# Allegro board CY8CPROTO-063-BLE Layout.brd
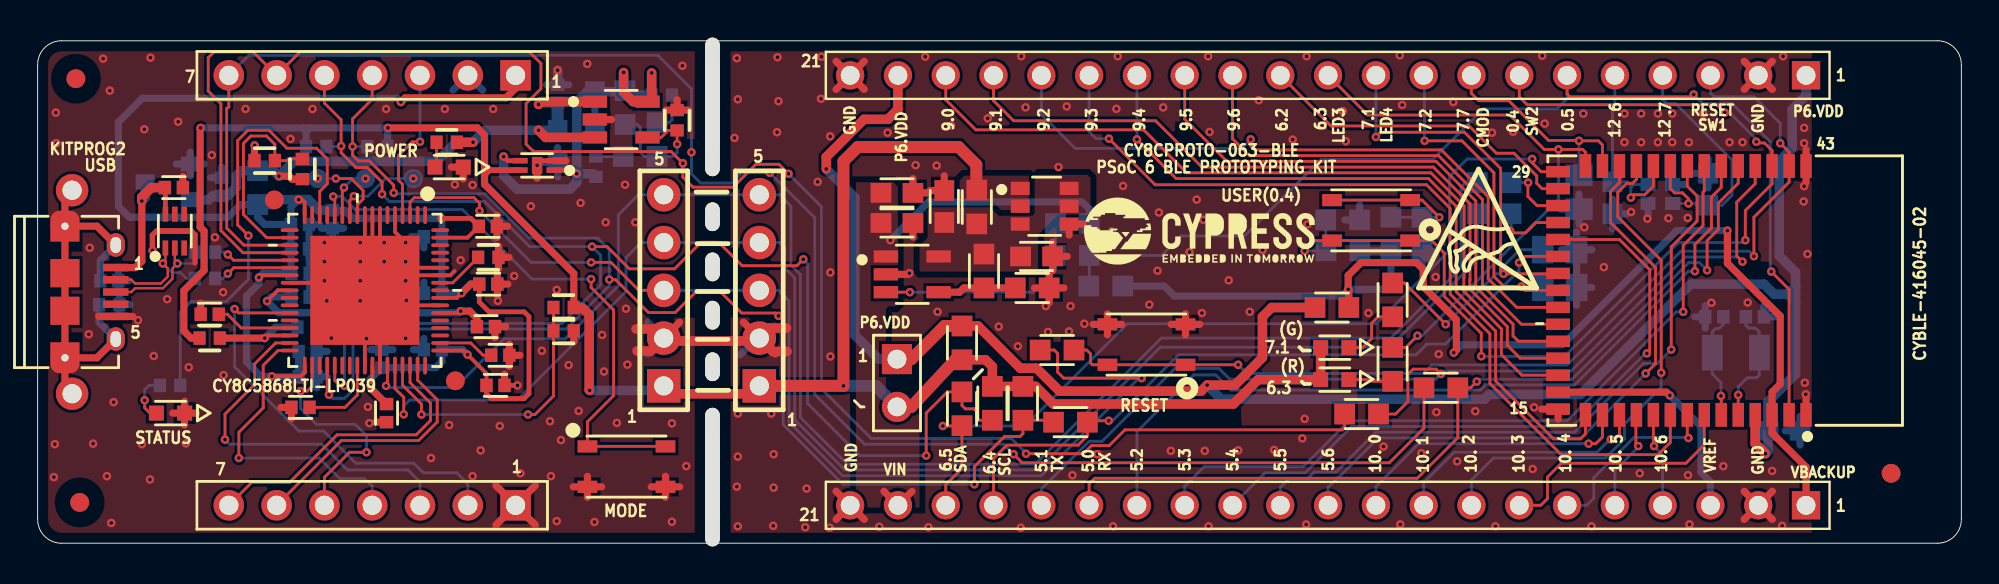
[diagram p0: board, top side]
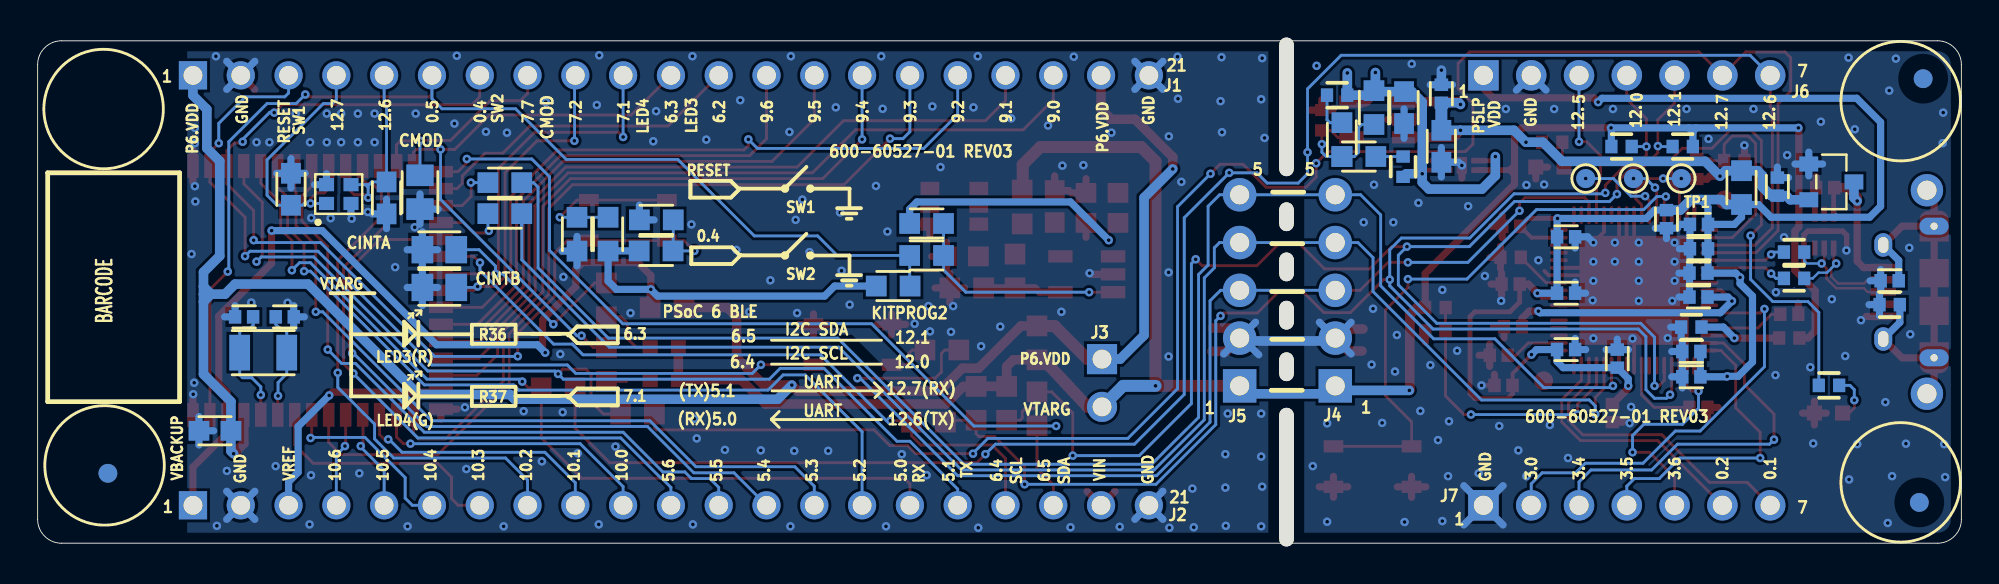
[diagram p1: board, bottom side, seen from below]

Outline 102.23 x 26.72 mm; copper layers: TOP, BOTTOM. Coordinates in mm from the lower left corner of the outline.
Outline path: 0,25.45 0,1.27 arc(0.37,0.37) 1.27,0 100.97,0 arc(101.86,0.37) 102.23,1.27 102.23,25.45 arc(101.86,26.34) 100.97,26.72 1.27,26.72 arc(0.37,26.34) 0,25.45

## Design rules (mm)
net group DIFFPAIR0: nets KP_DM KP_DP
net group POWER_PH: nets P5LP_VCCD P5LP_VDD
net group USB_V_SENSE: nets USB_V_SENSE VBUS
net group PWR_PH: nets GND_EARTH1
net group VTARG: nets I2C_SCL I2C_SDA P5LP_SIO_VREF VTARG_MEAS

## Placement (name value [footprint] x y rotation side)
C1  10nF  [CAPC1005_0402N]  3.81 13.95 0 bottom
C2  0.1uF  [CAPC1005_0402N]  7.24 18.91 0 top
C3  1.0 uF  [CAPC1005_0402N]  14.35 10.2 0 bottom
C4  0.1uF  [CAPC1005_0402N]  21.01 13.29 180 bottom
C5  1.0 uF  [CAPC1005_0402N]  13.97 14.36 0 bottom
C6  0.1uF  [CAPC1005_0402N]  23.93 16.85 0 top
C7  1.0 uF  [CAPC1005_0402N]  23.95 13.78 0 top
C8  0.1uF  [CAPC1005_0402N]  24.33 8.39 0 top
C9  1.0 uF  [CAPC1005_0402N]  21.01 16.29 180 bottom
C10  0.1uF  [CAPC1005_0402N]  13.94 15.66 0 bottom
C11  1.0 uF  [CAPC1005_0402N]  24.59 9.99 0 top
C12  1.0 uF  [CAPC1005_0402N]  9.14 12.18 180 top
C13  1.0 uF  [CAPC1005_0402N]  13.97 7.22 180 top
C14  1.0 uF  [CAPC1005_0402N]  23.83 11.52 0 top
C15  0.1uF  [CAPC1005_0402N]  13.97 13.09 0 bottom
C16  1.0 uF  [CAPC1005_0402N]  13.94 16.95 0 bottom
C17  0.1uF  [CAPC1005_0402N]  18.54 6.92 270 top
C18  1.0 uF  [CAPC1005_0402N]  21.01 10.3 180 bottom
C19  0.1uF  [CAPC1005_0402N]  18.29 9.81 90 bottom
C20  1.0 uF  [CAPC1005_0402N]  14.35 8.85 0 bottom
C21  0.1uF  [CAPC1005_0402N]  15.67 17.23 270 bottom
C22  4.7uF  [CAPC1608_0603M]  27.64 21.1 270 bottom
C23  0.1uF  [CAPC1005_0402N]  27.64 23.9 90 bottom
C24  4.7uF  [CAPC1608_0603M]  29.62 23.16 270 bottom
C25  4.7uF  [CAPC1608_0603M]  45.67 18.63 0 top
C26  0.1uF  [CAPC1608_0603M]  45.67 17.03 0 top
C27  4.7uF  [CAPC1608_0603M]  48.18 17.9 90 top
C28  0.1uF  [CAPC1608_0603M]  53.09 15.25 0 top
C29  10uF  [CAPC1608_0603M]  92.81 5.98 0 bottom
C30  0.47nF  [CAPC2012_0805N]  80.89 15.61 180 bottom
C31  0.47nF  [CAPC2012_0805N]  80.89 13.6 180 bottom
C32  2.2nF  [CAPC2012_0805N]  81.91 18.66 90 bottom
C34  10pF  [CAPC1608_0603M]  83.69 18.36 90 bottom
C35  10pF  [CAPC1608_0603M]  88.77 18.82 270 bottom
C36  18pF  [CAPC1005_0402N]  91.26 12.04 0 bottom
C37  33pF  [CAPC1005_0402N]  89.1 12.04 180 bottom
C38  0.1uF  [CAPC1005_0402N]  9.78 18.96 90 bottom
J1  CON 21x1  [CTST254P1X21_W260]  93.98 24.88 180 top
J2  CON 21x1  [CTST254P1X21_W260]  93.98 2.02 180 top
J3  HDR2  [3M_961102-6404-AR]  45.67 9.79 270 top
J4  CON 5x1  [HDR5X1]  33.27 8.37 0 top
J5  CON 5x1  [HDR5X1]  38.35 8.37 0 top
J6  CON 7x1  [SULLINS_PPTC071LFBN-RC]  25.4 24.88 180 top
J7  CON 7x1  [SULLINS_PPTC071LFBN-RC]  25.4 2.02 180 top
J8  10118194-0001LF  [FCI_10118194-0001LF]  4.15 14.66 270 top
JMP1  USB_Hold  [CON_RA_STIFF_850P]  1.83 7.95 90 top
LED1  AMBER LED  [LEDC1608_0603N]  21.87 20 0 top
LED2  AMBER LED  [LEDC1608_0603N]  7.06 6.92 0 top
LED3  RED LED  [LEDC1608_0603N]  68.94 8.7 0 top
LED4  GREEN LED  [LEDC1608_0603N]  68.94 10.4 0 top
NOREF  -  [unnamed]  35.86 4.15 0 top
NOREF#2  -  [#2]  101.86 0.37 0 top
NOREF#3  -  [#2]  101.35 46.25 0 top
NOREF#4  -  [unnamed#2]  35.86 9.38 0 top
NOREF#5  -  [unnamed#3]  2.24 2.17 0 top
NOREF#6  -  [#2]  76.68 -0.65 0 top
NOREF#7  -  [unnamed#2]  35.86 17.36 0 top
NOREF#8  -  [unnamed#2]  35.86 12.13 0 top
NOREF#9  -  [#2]  5.53 0 90 top
NOREF#10  -  [unnamed#3]  98.5 3.72 0 top
NOREF#11  -  [unnamed]  35.86 2.88 0 top
NOREF#12  -  [#2]  0 2.64 0 top
NOREF#13  -  [#2]  61.74 16.6 0 top
NOREF#14  -  [#2]  94.54 243.77 0 top
NOREF#15  -  [#2]  -10.67 -12.85 0 top
NOREF#16  -  [unnamed#3]  2.03 24.7 0 top
NOREF#17  -  [unnamed]  35.86 22.57 0 top
NOREF#18  -  [unnamed#2]  35.86 14.69 0 top
NOREF#19  -  [#2]  -310.39 -234.9 0 top
NOREF#20  -  [#2]  76.32 16.38 0 top
NOREF#21  -  [unnamed]  35.86 23.84 0 top
NOREF#22  -  [#2]  81.97 34.6 0 top
NOREF#23  -  [unnamed#3]  98.5 3.72 180 bottom
NOREF#24  -  [unnamed#3]  2.24 2.17 180 bottom
NOREF#25  -  [#2]  104.57 45.55 90 bottom
NOREF#26  -  [unnamed#3]  2.03 24.7 180 bottom
NOREF#27  -  [#2]  16.66 7.91 180 bottom
NOREF#28  -  [#2]  116.66 14.79 180 bottom
R1  100K  [RESC1005_0402M]  3.81 12.68 0 bottom
R2  2.2K  [RESC1005_0402M]  21.74 21.32 180 top
R3  0ohm  [RESC1608_0603M]  11.68 18.91 90 bottom
R4  15K  [RESC1005_0402M]  14.07 19.9 90 top
R5  30K  [RESC1005_0402M]  12.06 20.34 0 top
R6  180K  [RESC1608_0603M]  31.22 23.16 90 bottom
R7  57.6K  [RESC1005_0402M]  33.99 22.49 90 top
R8  383K  [RESC1005_0402M]  33.17 23.82 180 bottom
R9  0ohm  [RESC1608_0603M]  32.92 21.46 90 bottom
R12  100K  [RESC1005_0402M]  23.95 15.2 180 top
R13  49.9K  [RESC1005_0402M]  27.95 12.53 180 top
R14  49.9K  [RESC1005_0402M]  27.95 11.29 180 top
R15  15K  [RESC1005_0402M]  9.14 10.91 0 top
R16  30K  [RESC1005_0402M]  14.35 11.49 180 bottom
R17  2.2K  [RESC1005_0402M]  7.04 8.39 180 bottom
R18  22E  [RESC1005_0402M]  8.89 15.48 0 bottom
R19  22E  [RESC1005_0402M]  8.89 14.08 0 bottom
R20  4.7K  [RESC1005_0402M]  14.81 21.09 180 bottom
R21  4.7K  [RESC1005_0402M]  18.06 21.09 0 bottom
R22  180K  [RESC1608_0603M]  50.29 14.47 90 top
R23  57.6K  [RESC1608_0603M]  52.86 13.57 0 top
R27  0ohm  [RESC1608_0603M]  49.91 17.88 270 top
R28  0ohm  [RESC1608_0603M]  49.12 10.65 270 top
R29  0ohm  [RESC1608_0603M]  68.78 12.53 180 top
R30  10K  [RESC1608_0603M]  69.35 17.19 180 bottom
R31  0ohm  [RESC1608_0603M]  73.57 16.43 270 bottom
R32  0ohm  [RESC1608_0603M]  71.92 16.43 90 bottom
R33  10K  [RESC1608_0603M]  69.37 15.54 0 bottom
R36  470ohm  [RESC1608_0603M]  72.01 9.51 270 top
R37  330ohm  [RESC1608_0603M]  72.01 12.94 90 top
R38  4.7K  [RESC1608_0603M]  50.74 7.44 90 top
R39  4.7K  [RESC1608_0603M]  52.36 7.44 90 top
R40  120K  [RESC1005_0402M]  29.67 20.02 270 bottom
R41  0ohm  [RESC1608_0603M]  32.02 20.56 180 bottom
R44  0ohm  [RESC1608_0603M]  54.99 15.3 180 bottom
R45  10K  [RESC1608_0603M]  56.77 13.68 0 bottom
R46  0ohm  [RESC1608_0603M]  54.99 17 180 bottom
R47  0ohm  [RESC1608_0603M]  54.18 10.27 0 top
R48  0ohm  [RESC1608_0603M]  77.41 17.52 0 bottom
R49  0ohm  [RESC1608_0603M]  77.41 19.17 0 bottom
R50  0ohm  [RESC1608_0603M]  54.89 6.44 0 top
R51  0ohm  [RESC1608_0603M]  49.12 7.15 270 top
R52  0ohm  [RESC1608_0603M]  74.57 8.27 0 top
R53  0ohm  [RESC1608_0603M]  70.36 6.87 0 top
SW1  SKRPACE010  [SW_SKRPACE010]  58.93 10.56 180 top
SW2  SKRPACE010  [SW_SKRPACE010]  70.87 17.17 180 top
SW3  SKRPACE010  [SW_SKRPACE010]  31.29 4.07 0 top
TP1  TP_SMD  [TP102C]  14.88 19.39 180 bottom
TP2  TP_SMD  [TP102C]  19.96 19.39 180 bottom
TP3  TP_SMD  [TP102C]  17.42 19.39 180 bottom
U1  CY8C5868LTI-LP039  [QFN40P800X800X100-69M]  17.39 13.45 270 top
U2  AP7365-WG-7  [SOT95P285X140-5M]  31.01 22.53 0 top
U3  SiP32408  [TDFN50P160X120X60-5M]  26.54 20.09 180 top
U4  PUSBM12VX4-TL,115  [SON50P160X160X50-7M]  7.29 16.6 90 top
U5  CYBLE-416045-02  [BLE-QFN43-416045]  80.41 20.44 270 top
U6  AP7365-WG-7  [SOT95P285X140-5M]  46.48 14.3 0 top
U7  SIP32510DT-T1-GE3  [SOT26-1_2_3_4_5_6]  53.52 17.92 0 top
U8  AP2331TDW-7  [SC-59_1_2_3]  6.91 19.21 180 bottom
Y1  24MHz  [XTALS4_2MX1M6]  86.23 18.56 90 bottom
Y2  32.768KHz  [XTAL320X150X90N_ECS]  90.25 10.13 180 bottom

## Library data of the parts
C1 C2 C26 C28 C38 = CAPACITOR NON-POL
C3 C5 C7 C9 C11-C14 C16 C18 C20 = CAPACITOR NON-POL: signal model: DEFAULT_CAPACITOR_1e+06pF_2_1
C4 C6 C8 C10 C15 C17 C19 C21 = CAPACITOR NON-POL: signal model: DEFAULT_CAPACITOR_100000pF_2_1
C22-C25 C27 C29 C34 C35 = CAP-NP
C30-C32 = CAP
C36 C37 = CAP NP
J1 J2 = CONN TRBLK 23_2: User Part Number: Part No
J3 = HEADER 2_0
J4 = CONN PCB 5_0
J5 = CONN PCB 5
J6 J7 = CONN PCB 7
J8 = USB MICRO R/A DIP_1
JMP1 = USB_JUMP_0
LED1 LED2 LED4 = LED_2
LED3 = LED_1
R1-R3 R6-R9 R17-R19 R22 R23 R27-R30 R33 R36 R40 R41 R44-R53 = RESISTOR
R4 R15 = RESISTOR: signal model: DEFAULT_RESISTOR_15000OHM_2_1
R5 R16 = RESISTOR: signal model: DEFAULT_RESISTOR_30000OHM_2_1
R12 = RESISTOR: signal model: DEFAULT_RESISTOR_100000OHM_2_1
R13 R14 = RESISTOR: signal model: DEFAULT_RESISTOR_49900OHM_2_1
R20 R21 R38 R39 = RESISTOR: signal model: DEFAULT_RESISTOR_4700OHM_2_1
R31 R32 = 330 ohm 5% 0805_0
R37 = RES
SW1-SW3 = SW PUSH NO 4-PIN
TP1-TP3 = TEST_POINT
U1 = CY8C38***-QFN68_0
U2 = AP7365-WG-7_5
U3 = SiP32408_1
U4 = PUSBM12VX4-TL,115_0
U5 = CY8CTMA300-48LQXI_29
U6 = AP7365-WG-7_6
U7 = SiP32408_3
U8 = AP2331TDW-7_1: User Part Number: Part No
Y1 = CRYSTAL_4pads: User Part Number: Part No
Y2 = CRYSTAL

## Footprints (pads in the part's own frame, mm; a bottom-side part is the same pattern mirrored in y, then rotated)
3M_961102-6404-AR
  rect 1.6x1.6 hole 1: 1(0,0)
  round 1.6 hole 1: 2(2.54,0)
BLE-QFN43-416045
  rect 1.27x0.61 smd: 1(13.619,13.571) 2(13.619,12.669) 3(13.619,11.768) 4(13.619,10.866) 5(13.619,9.964) 6(13.619,9.062) 7(13.619,8.161) 8(13.619,7.259) 9(13.619,6.357) 10(13.619,5.456) 11(13.619,4.554) 12(13.619,3.652) 13(13.619,2.751) 14(13.619,1.849) 30(0.388,1.849) 31(0.388,2.751) 32(0.388,3.652) 33(0.388,4.554) 34(0.388,5.456) 35(0.388,6.357) 36(0.388,7.259) 37(0.388,8.161) 38(0.388,9.062) 39(0.388,9.964) 40(0.388,10.866) 41(0.388,11.768) 42(0.388,12.669) 43(0.388,13.571)
  rect 0.61x1.27 smd: 15(13.312,0.391) 16(12.41,0.391) 17(11.509,0.391) 18(10.607,0.391) 19(9.705,0.391) 20(8.804,0.391) 21(7.902,0.391) 22(7,0.391) 23(6.099,0.391) 24(5.197,0.391) 25(4.295,0.391) 26(3.393,0.391) 27(2.492,0.391) 28(1.59,0.391) 29(0.688,0.391)
CAPC1005_0402N
  rect 0.66x0.72 smd: 1(-0.48,0) 2(0.48,0)
CAPC1608_0603M
  rect 1.1x1.05 smd: 1(-0.85,0) 2(0.85,0)
CAPC2012_0805N
  rect 1.15x1.45 smd: 1(-0.9,0) 2(0.9,0)
CON_RA_STIFF_850P
  round 1.72 hole 1.02: 1(0,0) 2(10.82,0)
CTST254P1X21_W260
  rect 1.5x1.5 hole 1: 1(0,0)
  round 1.5 hole 1: 2(2.54,0) 3(5.08,0) 4(7.62,0) 5(10.16,0) 6(12.7,0) 7(15.24,0) 8(17.78,0) 9(20.32,0) 10(22.86,0) 11(25.4,0) 12(27.94,0) 13(30.48,0) 14(33.02,0) 15(35.56,0) 16(38.1,0) 17(40.64,0) 18(43.18,0) 19(45.72,0) 20(48.26,0) 21(50.8,0)
FCI_10118194-0001LF
  rect 0.4x1.35 smd: 1(0,0) 2(0.65,0) 3(1.3,0) 4(1.95,0) 5(2.6,0)
  oval 1.25x0.95 hole 0.85x0.55: SH1(-1.2,0) SH2(3.8,0)
  custom 1.645x1.55 hole 1.15x0.5: SH3(-2.2,-2.7) SH6(4.8,-2.7)
  rect 1.5x1.55 smd: SH4(0.3,-2.7) SH5(2.3,-2.7)
HDR5X1
  rect 1.778x1.778 hole 1.016: 1(0,0)
  round 1.778 hole 1.016: 2(0,2.54) 3(0,5.08) 4(0,7.62) 5(0,10.16)
LEDC1608_0603N
  rect 0.8x0.8 smd: A(-0.75,0) K(0.75,0)
QFN40P800X800X100-69M
  round 1 smd: (-4.809,-4.809) (4.809,4.809)
  oval 0.95x0.2 smd: 1(-4,3.2) 2(-4,2.8) 3(-4,2.4) 4(-4,2) 5(-4,1.6) 6(-4,1.2) 7(-4,0.8) 8(-4,0.4) 9(-4,0) 10(-4,-0.4) 11(-4,-0.8) 12(-4,-1.2) 13(-4,-1.6) 14(-4,-2) 15(-4,-2.4) 16(-4,-2.8) 17(-4,-3.2) 35(4,-3.2) 36(4,-2.8) 37(4,-2.4) 38(4,-2) 39(4,-1.6) 40(4,-1.2) 41(4,-0.8) 42(4,-0.4) 43(4,0) 44(4,0.4) 45(4,0.8) 46(4,1.2) 47(4,1.6) 48(4,2) 49(4,2.4) 50(4,2.8) 51(4,3.2)
  oval 0.2x0.95 smd: 18(-3.2,-4) 19(-2.8,-4) 20(-2.4,-4) 21(-2,-4) 22(-1.6,-4) 23(-1.2,-4) 24(-0.8,-4) 25(-0.4,-4) 26(0,-4) 27(0.4,-4) 28(0.8,-4) 29(1.2,-4) 30(1.6,-4) 31(2,-4) 32(2.4,-4) 33(2.8,-4) 34(3.2,-4) 52(3.2,4) 53(2.8,4) 54(2.4,4) 55(2,4) 56(1.6,4) 57(1.2,4) 58(0.8,4) 59(0.4,4) 60(0,4) 61(-0.4,4) 62(-0.8,4) 63(-1.2,4) 64(-1.6,4) 65(-2,4) 66(-2.4,4) 67(-2.8,4) 68(-3.2,4)
  rect 5.8x5.8 smd: H(0,0)
RESC1005_0402M
  rect 0.65x0.72 smd: 1(-0.54,0) 2(0.54,0)
RESC1608_0603M
  rect 1.1x1.1 smd: 1(-0.9,0) 2(0.9,0)
SC-59_1_2_3
  rect 1x0.8 smd: 1(-1.2,0.95) 2(-1.2,-0.95) 3(1.2,0)
SON50P160X160X50-7M
  rect 0.8x0.3 smd: 1(-0.9,0.5) 2(-0.9,0) 3(-0.9,-0.5) 4(0.9,-0.5) 5(0.9,0) 6(0.9,0.5)
  rect 0.3x1.6 smd: 7(0,0)
SOT26-1_2_3_4_5_6
  rect 1x0.7 smd: 1(-1.3,0.95) 2(-1.3,0) 3(-1.3,-0.95) 4(1.3,-0.95) 5(1.3,0) 6(1.3,0.95)
SOT95P285X140-5M
  rect 1.3x0.65 smd: 1(-1.4,0.95) 2(-1.4,0) 3(-1.4,-0.95) 4(1.4,-0.95) 5(1.4,0.95)
SULLINS_PPTC071LFBN-RC
  rect 1.62x1.62 hole 1.02: 1(0,0)
  round 1.62 hole 1.02: 2(2.54,0) 3(5.08,0) 4(7.62,0) 5(10.16,0) 6(12.7,0) 7(15.24,0)
SW_SKRPACE010
  rect 1.05x0.65 smd: 1(-2.075,1.075) 2(2.075,1.075) 3(-2.075,-1.075) 4(2.075,-1.075)
TDFN50P160X120X60-5M
  rect 0.8x0.3 smd: 1(-0.9,0.25) 2(-0.9,-0.25) 3(0.9,-0.25) 4(0.9,0.25)
  rect 0.55x0.9 smd: H(0,0)
TP102C
  round 1.016 smd: 1(0,0)
unnamed
  oval 0.762x6.096 hole 0.762x6.096 unplated: (0,0)
unnamed#2
  oval 0.762x1.524 hole 0.762x1.524 unplated: (0,0)
unnamed#3
  round 1 smd: (0,0)
XTAL320X150X90N_ECS
  rect 1.1x1.9 smd: 1(-1.25,0) 2(1.25,0)
XTALS4_2MX1M6
  rect 0.7x0.8 smd: 1(-0.5,0.65) 2(-0.5,-0.65) 3(0.5,-0.65) 4(0.5,0.65)

## Nets
GND: C1.2 C2.2 C3.2 C4.2 C5.2 C6.2 C7.2 C8.2 C9.2 C10.2 C11.2 C12.2 C13.2 C14.2 C15.2 C16.2 C17.2 C18.2 C19.2 C20.2 C21.2 C22.2 C23.2 C24.2 C25.2 C26.2 C27.2 C28.2 C29.2 C30.1 C31.1 C32.1 C34.1 C35.1 C36.2 C37.2 C38.2 J1.2 J1.21 J2.2 J2.21 J4.2 J5.2 J6.2 J7.1 J8.5(GND) LED1.K(CATHODE) LED2.K(CATHODE) R1.2 R5.1 R7.2 R12.1 R14.1 R16.1 R23.2 R30.1 R31.2 SW1.3 SW1.4 SW3.3 SW3.4 U1.5(VSSB) U1.7(VBOOST) U1.8(VBAT) U1.9(VSSD#9) U1.25(VSSD#25) U1.43(VSSA) U1.45(VSSD#45) U1.58(VSSD#58) U1.62(P2[0]) U1.63(P2[1]) U1.H(EPAD) U2.2(GND) U3.2(GND) U3.H(PAD) U4.7 U5.1(GND1) U5.15(GND2) U5.43(GND3) U6.2(GND) U7.4(GND) U8.1(GND) Y1.2 Y1.4
GND_EARTH1: C1.1 J8.SH1(S1) J8.SH2(S2) J8.SH3(S3) J8.SH4(S4) J8.SH5(S5) J8.SH6(S6) JMP1.1 JMP1.2 R1.1
VBUS: C22.1 C23.1 C38.1 R2.1 R3.2 R4.1 U2.1(IN) U2.3(EN) U8.2(OUT)
VBUS_IN: C2.1 J8.1(VBUS) U4.6 U8.3(IN)
VCC_3V3: C27.1 C28.1 R22.2 R27.2 U6.5(OUT) U7.3(EN) U7.5(IN#5) U7.6(IN#6)
VIN: C25.1 C26.1 J2.20 R46.1 U6.1(IN)
I2C_SCL: J6.4 R21.1 R39.1 R50.1 U1.38(P12[0])
I2C_SDA: J6.5 R20.1 R38.1 R51.1 U1.39(P12[1])
KP_DM: J8.2(DM) R19.1 U4.1
KP_DP: J8.3(DP) R18.1 U4.2
P0_0: C36.1 U5.5(P0_0) Y2.1
P0_1: C37.1 U5.6(P0_1) Y2.2
P0_4: J1.7 R30.2 R33.1 SW2.1 SW2.2 U5.41(P0_4)
P0_5: J1.6 R44.1 R45.1 U5.2(P0_5)
P5_0: J2.16 R52.2 U5.39(P5_0)
P5_1: J2.17 R53.2 U5.40(P5_1)
P5_2: J2.15 U5.38(P5_2)
P5_3: J2.14 U5.37(P5_3)
P5_4: J2.13 U5.25(P5_4)
P5_5: J2.12 U5.36(P5_5)
P5_6: J2.11 U5.32(P5_6)
P5LP0_1: J7.7 U1.49(P0[1])
P5LP0_2: J7.6 U1.50(P0[2])
P5LP1_2: SW3.1 SW3.2 U1.13(P1[2])
P5LP1_4: R17.1 U1.15(P1[4])
P5LP2_2: U1.64(P2[2])
P5LP2_3: U1.65(P2[3])
P5LP2_4: U1.66(P2[4])
P5LP3_0: J7.2 U1.29(P3[0])
P5LP3_4: J7.3 U1.33(P3[4])
P5LP3_5: J7.4 U1.34(P3[5])
P5LP3_6: J7.5 U1.36(P3[6])
P5LP12_5: J6.3 U1.4(P12[5])
P5LP_SIO_VREF: R13.2 R14.2 U1.48(P0[0])
P5LP_VCCD: C14.1 C15.1 U1.26(VCCD#26) U1.57(VCCD#57)
P5LP_VDD: C3.1 C4.1 C5.1 C6.1 C7.1 C8.1 C9.1 C10.1 C16.1 C17.1 C18.1 C19.1 C20.1 C21.1 J6.1 R3.1 U1.17(VDDIO1) U1.24(VDDD#24) U1.35(VDDIO3) U1.44(VDDA) U1.52(VDDIO) U1.59(VDDD#59) U1.67(VDDIO2)
P6_2: J1.12 U5.28(P6_2)
P6_3: J1.11 R36.1 U5.30(P6_3)
P6_4: J2.18 R50.2 U5.24(P6_4)
P6_5: J2.19 R51.2 U5.29(P6_5)
P6_6: R49.2 U5.27(P6_6)
P6_7: R48.2 U5.26(P6_7)
P6_VDD: C29.1 J1.1 J1.20 J3.1 R28.1 R29.2 U5.4(VDD)
P7_1: C30.2 J1.10 R37.2 U5.23(P7_1)
P7_2: C31.2 J1.9 U5.22(P7_2)
P7_7: C32.2 J1.8 U5.31(P7_7)
P9_0: J1.19 U5.17(P9_0)
P9_1: J1.18 U5.18(P9_1)
P9_2: J1.17 U5.21(P9_2)
P9_3: J1.16 U5.9(P9_3)
P9_4: J1.15 U5.14(P9_4)
P9_5: J1.14 U5.19(P9_5)
P9_6: J1.13 U5.20(P9_6)
P10_0: J2.10 U5.13(P10_0)
P10_1: J2.9 U5.12(P10_1)
P10_2: J2.8 U5.33(P10_2)
P10_3: J2.7 U5.7(P10_3)
P10_4: J2.6 U5.8(P10_4)
P10_5: J2.5 U5.11(P10_5)
P10_6: J2.4 U5.10(P10_6)
P12_6: C34.2 J1.5 U5.34(P12_6) Y1.3
P12_7: C35.2 J1.4 U5.35(P12_7) Y1.1
PMIC_EN: R44.2 R46.2 U6.3(EN)
RESET: J4.3 J5.3 R47.1 U1.3(P12[4])
SWDCLK: J4.4 J5.4 R48.1 U1.47(P12[3])
SWDIO: J4.5 J5.5 R49.1 U1.46(P12[2])
UART_CTS: R12.2 U1.61(P15[5])
UART_RX: J6.6 R53.1 U1.21(P12[7])
UART_TX: J6.7 R52.1 U1.20(P12[6])
USB_V_SENSE: R4.2 R5.2 U1.19(P1[7])
VBACKUP: J2.1 R29.1 R32.1 R33.2 R45.2 U5.3(VBACKUP)
VOUT: C24.1 R6.2 R8.2 R40.2 U2.5(OUT) U3.1(IN) U3.3(EN)
VREF: J2.3 U5.16(VREF)
VTARG: J3.2 J4.1 J5.1 LED3.A(ANODE) LED4.A(ANODE) R13.1 R15.1 R20.2 R21.2 R27.1 R28.2 R38.2 R39.2 U3.4(OUT) U7.1(OUT#1) U7.2(OUT#2)
VTARG_MEAS: R15.2 R16.2 U1.32(P3[3])
XRES: J1.3 R47.2 SW1.1 SW1.2 U5.42(XRES)
N17125101: C12.1 U1.31(P3[2])
N17125106: C11.1 U1.53(P0[4])
N17125108: C13.1 U1.42(VCCA)
N17125157: R18.2 U1.22(P15[6] D+)
N17125159: R19.2 U1.23(P15[7] D-)
N19176724: LED3.K(CATHODE) R36.2
N19176763: LED4.K(CATHODE) R37.1
N19177069: R31.1 R32.2 SW2.3 SW2.4
N19178187: R22.1 R23.1 U6.4(ADJ)
N19186096: LED2.A(ANODE) R17.2
N19227002: R6.1 R7.1 R9.1 R41.1 U2.4(ADJ)
N19228339: R8.1 R9.2
N19237692: LED1.A(ANODE) R2.2
N19253849: TP1.1 U1.10(X\R\E\S\)
N19308882: R40.1 R41.2
N19328633: TP2.1 U1.11(P1[0])
N19328636: TP3.1 U1.12(P1[1])

Pads without a net: J8 4; U1 1 2 6 14 16 18 27 28 30 37 40 41 51 54 55 56 60 68; U4 3 4 5

## Via types
v1: diameter 0.45, hole 0.2, TOP to BOTTOM, 351 vias

## Routing (per net, layer and track width the routed paths; a pad name or vN(x,y) marks a point on that pad's centre or on a via; arc(x,y) is an arc through that point)
GND: length 206
  TOP w0.203: U1.5 18.99,16.55 v1(19.56,15.99) ; U1.7 18.19,16.21 v1(18.41,15.99) ; U1.8 17.79,15.62 v1(17.14,14.97) ; v1(17.14,12.89) 18.19,11.84 U1.45 ; 22.16,14.48 21.93,14.25 U1.62 19.85,14.25 v1(19.56,13.95) ; U1.58 19.86,12.65 v1(19.6,12.91) ; U1.63 19.88,14.65 v1(19.56,14.97) ; U1.25 15.13,13.85 v1(15.24,13.95) ; U1.9 17.39,16.23 v1(17.14,15.99) ; v1(17.48,10.88) 17.39,10.8 U1.43
  TOP w0.254: v1(26.54,20.09) 26.79,20.34 U3.2 ; C8.2 v1(25.5,8.39)
  TOP w0.279: 8.36,14.9 8.36,16.4 8.17,16.6 U4.7 6.31,16.6 6.1,16.38 6.1,15.58 v1(6.11,15.57)
  TOP w0.381: 24.41,16.26 C6.2 ; C6.2 24.41,17.44 ; C6.2 24.97,16.85 ; v1(46.33,14.36) 46.27,14.3 U6.2 ; J2.2 92.18,1.27 ; J2.2 92.18,2.76 ; J2.2 90.7,1.27 ; J2.2 90.7,2.76 ; 26.54,19.41 v1(26.54,20.09) ; 13.49,6.63 C13.2 12.93,7.22 ; 48.18,19.54 C27.2 47.43,18.75 ; LED2.K 8.44,6.92 ; LED2.K 7.81,6.29 ; LED2.K 7.18,6.92 ; LED2.K 7.81,7.55 ; 42.44,25.62 J1.21 ; J1.21 43.92,24.13 ; J1.21 43.92,25.62 ; J1.21 42.44,24.13 ; C12.2 8.66,12.77 ; 90.7,25.62 J1.2 ; J1.2 90.7,24.13 ; J1.2 92.18,24.13 ; J1.2 92.18,25.62 ; C7.2 24.43,14.37 ; C7.2 24.43,13.19 ; C7.2 24.99,13.78 ; C11.2 25.07,10.58 ; C11.2 25.07,9.4 ; C11.2 25.63,9.99 ; C2.2 7.72,19.5 ; R12.1 25.05,15.2 ; R12.1 24.49,15.79 ; R12.1 24.49,14.61 ; J4.2 34.12,11.75 ; 46.52,16.27 C26.2 ; J2.21 43.92,1.27 ; J2.21 42.44,2.76 ; J2.21 42.44,1.27 ; 29.22,2.44 SW3.3 ; SW3.3 29.97,3 ; SW3.3 28.46,3 ; SW3.3 29.22,3.56 ; 17.95,6.44 C17.2 ; U5.1 93.98,7.69 ; 33.39,23.03 R7.2 ; R7.2 33.99,23.59 ; R7.2 34.58,23.03 ; 56.85,11.08 SW1.4 ; SW1.4 57.61,11.64 ; SW1.4 56.1,11.64 ; SW1.4 56.85,12.2 ; 93.98,19.19 U5.43 93.98,20.92 ; SW1.3 61.76,11.64 ; SW1.3 61,11.08 ; SW1.3 61,12.2 ; SW1.3 60.25,11.64 ; R23.2 53.76,14.36 ; R23.2 53.76,12.79 ; R23.2 52.98,13.57 ; R23.2 54.54,13.57 ; 37.51,11.75 J5.2 ; 32.61,3 SW3.4 ; SW3.4 34.12,3 ; SW3.4 33.37,3.56 ; SW3.4 33.37,2.44 ; 21.99,20 LED1.K 22.62,19.37 ; C28.2 53.94,16.01 ; C28.2 53.94,14.49 ; C28.2 54.72,15.25 ; v1(11.53,21.16) 11.52,21.15 R5.1 ; 79.94,7.13 U5.15 80.8,6.6 ; 24.87,11.52 C14.2 24.31,10.92 ; 39.2,10.06 39.07,10.2 ; 47.3,18.63 C25.2 46.52,19.39 ; 54.82,16.39 U7.4 55.55,16.97 ; J7.1 26.44,0.98 ; J7.1 24.36,0.98 ; J7.1 24.36,3.06 ; J7.1 26.44,3.06 ; U2.2 30.49,22.53 ; 5.06,12.06 J8.5 3.24,12.06 ; 28.49,10.7 R14.1 ; C8.2 24.81,8.98 ; U3.2 28.07,20.34
  TOP w0.508: 31.8,11.39 32.79,11.39 J4.2 ; J4.2 33.43,10.75 38.2,10.75 J5.2 ; J4.2 32.59,10.22 31.85,10.22 ; 39.83,10.2 39.07,10.2 J5.2 ; J5.2 38.89,11.44 39.8,11.44
  BOTTOM w0.381: 9.19,19.44 C38.2 9.78,20 ; C34.1 83.69,18.29 ; C34.1 84.45,17.51 ; C34.1 83.69,16.73 ; C20.2 14.83,9.44 ; C20.2 14.83,8.26 ; C20.2 15.39,8.85 ; C21.2 16.26,16.75 ; C21.2 15.08,16.75 ; C21.2 15.67,16.19 ; 20.53,13.89 C4.2 19.97,13.29 ; 17.7,10.29 C19.2 ; C19.2 18.29,10.86 ; C19.2 18.88,10.29 ; 90.7,2.76 J2.2 ; J2.2 92.18,2.76 ; J2.2 92.18,1.27 ; J2.2 90.7,1.27 ; 88.62,11.45 C37.2 ; C37.2 88.06,12.04 ; C37.2 88.62,12.63 ; 80.96,17.76 C32.1 ; C32.1 81.91,16.96 ; C32.1 81.91,18.57 ; C1.2 4.29,14.55 ; C1.2 4.85,13.95 ; C1.2 4.29,13.36 ; J1.2 92.18,24.13 ; J1.2 92.18,25.62 ; J1.2 90.7,25.62 ; R1.2 4.91,12.68 ; R1.2 4.35,12.09 ; R1.2 4.35,13.28 ; 14.99,16.95 C16.2 14.42,16.36 ; 14.45,13.68 C15.2 15.01,13.09 ; C3.2 15.39,10.2 ; C3.2 14.83,9.6 ; C3.2 14.83,10.79 ; 91.74,12.63 C36.2 92.3,12.04 ; 37.51,11.75 J5.2 ; J5.2 38.23,10.91 37.34,10.02 ; J5.2 39.2,10.06 ; 29.62,23.09 C24.2 29.62,21.53 ; C5.2 14.45,14.95 ; C5.2 15.01,14.36 ; C5.2 14.45,13.77 ; J4.2 34.12,11.75 ; J4.2 32.43,11.75 ; J4.2 32.43,10.06 ; 42.44,1.27 J2.21 ; J2.21 43.92,1.27 ; J2.21 42.44,2.76 ; C10.2 14.42,16.25 ; C10.2 14.99,15.66 ; C10.2 14.42,15.06 ; 15.45,11.49 R16.1 14.89,10.9 ; v1(26.54,20.09) 26.71,20.25 C22.2 ; C35.1 88.77,20.45 ; C35.1 89.53,19.67 ; C35.1 88.02,19.67 ; C35.1 88.77,18.89 ; 7.38,20.16 U8.1 ; U8.1 8.11,19.53 ; U8.1 8.11,20.79 ; U8.1 8.84,20.16 ; 70.25,17.98 R30.1 69.47,17.19 ; 27.64,19.47 C22.2 ; C22.2 27.64,21.04 ; 28.23,24.38 C23.2 27.04,24.38 ; J1.21 43.92,25.62 ; J1.21 43.92,24.13 ; J1.21 42.44,24.13 ; J1.21 42.44,25.62 ; 81.79,12.64 C31.1 ; C31.1 80.98,13.6 ; C31.1 82.59,13.6 ; C31.1 81.79,14.56 ; 93.66,5.22 C29.2 ; C29.2 92.88,5.98 ; C29.2 93.66,6.74 ; 86.88,19.65 Y1.4 87.51,19.06 ; 24.36,3.06 J7.1 ; J7.1 24.36,0.98 ; J7.1 26.44,0.98 ; J7.1 26.44,3.06 ; 20.53,15.7 C9.2 19.86,16.29 v1(19.56,15.99) ; 81.79,14.65 C30.1 ; C30.1 80.98,15.61 ; C30.1 81.79,16.56 ; C30.1 82.59,15.61 ; 23.65,24.09 J6.2 22.07,24.09 ; 19.96,10.3 C18.2 20.53,10.89 ; R31.2 73.57,16.31 ; R31.2 73.57,14.75 ; R31.2 74.35,15.53 ; 85.58,17.48 Y1.2
  BOTTOM w0.508: J4.2 33.43,10.75 38.2,10.75 J5.2 ; C23.2 v1(27.64,25.16)
  vias: v1(0.86,3.52) v1(0.97,22.9) v1(0.99,21.27) v1(0.91,5.27) v1(2.77,15.71) v1(2.72,11.11) v1(2.95,5.29) v1(3.48,25.77) v1(3.68,3.57) v1(3.84,24.06) v1(3.91,1.08) v1(4.04,7.5) v1(5.33,11.86) v1(5.54,5.27) v1(5.66,22.01) v1(5.99,25.82) v1(5.97,3.39) v1(6.17,9.95) v1(6.88,12.98) v1(7.47,22.41) v1(7.87,5.31) v1(8.03,9.36) v1(9.26,20.63) v1(9.42,16.27) v1(9.86,13.35) v1(9.88,8.94) v1(11.05,23.09) v1(13.44,21.5) v1(14.61,23.09) v1(15.24,15.99) v1(15.24,14.97) v1(15.37,12.89) v1(15.61,10.91) v1(17.14,13.95) v1(17.55,7.25) v1(17.63,6.39) v1(18.41,14.97) v1(18.52,23.09) v1(19.56,10.89) v1(20.9,4.53) v1(21.64,23.09) v1(21.87,6.28) v1(22.17,19.07) v1(22.48,15.05) v1(23.11,19.05) v1(23.11,3.57) v1(23.55,4.94) v1(24.21,23.09) v1(24.46,12.89) v1(24.56,6.23) v1(25.32,14.21) v1(25.65,3.72) v1(26.21,17.92) v1(26.8,10.23) v1(27.23,6.49) v1(27.28,3.57) v1(27.58,13.47) v1(27.58,1.18) v1(27.81,5.48) v1(28.22,9.47) v1(28.75,7.03) v1(28.85,18.09) v1(29.21,25.49) v1(29.59,1.13) v1(30,11.07) v1(30.1,9.13) v1(30.19,17.07) v1(30.78,6.4) v1(31.22,19.06) v1(31.27,12.47) v1(31.34,9.5) v1(31.76,17.07) v1(33.71,6.37) v1(33.71,1.14) v1(34.26,25.38) v1(34.47,4.1) v1(37.03,21.55) v1(37.16,25.79) v1(37.16,3.01) v1(37.21,23.61) v1(37.21,6.89) v1(37.21,4.61) v1(37.21,0.9) v1(38.99,6.89) v1(39.09,0.92) v1(39.12,4.73) v1(39.12,2.96) v1(39.29,21.85) v1(39.32,25.84) v1(39.37,23.51) v1(40.79,0.85) v1(40.87,2.91) v1(41.45,19.21) v1(41.66,25.87) v1(41.63,23.63) v1(42.09,0.82) v1(42.12,21.63) v1(42.13,14.4) v1(42.13,9.93) v1(44.73,0.87) v1(45.17,21.83) v1(46.66,20.1) v1(47.17,25.87) v1(47.35,0.85) v1(47.78,20.08) v1(47.83,12.3) v1(48.54,22.21) v1(50.5,22.59) v1(51.08,11.52) v1(52.1,10.47) v1(52.27,25.89) v1(52.25,0.82) v1(52.5,23.17) v1(53.58,12.61) v1(53.7,11.24) v1(54.25,20) v1(54.69,23.23) v1(54.89,12.61) v1(54.81,11.26) v1(54.99,3.62) v1(55.63,11.67) v1(56.31,4.73) v1(57.07,16.57) v1(57.15,0.9) v1(57.4,25.89) v1(57.33,23.1) v1(57.68,19) v1(59.08,12.68) v1(59.59,17.59) v1(59.51,14.49) v1(59.82,23.17) v1(60.22,4.91) v1(61.21,15.48) v1(61.59,18.27) v1(61.87,12.24) v1(61.95,17.19) v1(62.03,4.91) v1(62.2,25.89) v1(62.28,21.87) v1(62.23,0.9) v1(63.3,13.98) v1(63.8,4.94) v1(64.41,12.3) v1(64.9,23.56) v1(65.1,15.59) v1(65.71,4.96) v1(66.7,21.46) v1(67.21,5.57) v1(67.34,6.61) v1(67.44,25.89) v1(67.49,16.95) v1(67.41,1) v1(69.37,22.97) v1(69.52,21.37) v1(70.73,12.24) v1(71.53,5.14) v1(72.39,25.94) v1(72.42,1) v1(72.52,23.3) v1(73.53,4.79) v1(74.3,14.16) v1(74.33,6.97) v1(74.46,10.06) v1(75.23,23.45) v1(75.44,4.35) v1(76.4,7.02) v1(77.29,21.83) v1(77.47,0.9) v1(78.41,21.88) v1(79.45,3.95) v1(79.53,7.22) v1(79.96,25.92) v1(80.09,22.31) v1(82.14,22.84) v1(82.19,16.8) v1(82.58,0.9) v1(83.24,14.68) v1(84.33,22.84) v1(84.33,21.32) v1(84.68,17.61) v1(85.14,3.72) v1(85.22,22.84) v1(85.22,21.32) v1(85.55,17.26) v1(86.11,22.84) v1(86.11,21.32) v1(86.66,17.28) v1(86.87,22.84) v1(86.87,21.32) v1(87.69,17.29) v1(87.71,3.62) v1(87.76,21.32) v1(87.78,1) v1(88.52,22.84) v1(88.95,12.79) v1(89.59,4.1) v1(89.92,21.32) v1(90.6,21.32) v1(90.88,12.8) v1(92.18,3.85) v1(92.71,0.92) v1(92.76,25.89) v1(93.88,22.08) v1(93.88,21.27) v1(93.88,18.98) v1(93.85,18.17) v1(93.92,8.53) v1(93.97,7.92) v1(94.06,15.38)
GND_EARTH1: length 21.8
  TOP w0.381: J8.SH2 3.15,9.86 J8.SH6 ; JMP1.1 1.45,8.33 J8.SH6 ; J8.SH3 J8.SH4 J8.SH5 J8.SH6 ; J8.SH3 3.15,16.86 J8.SH1 ; J8.SH3 1.45,18.39 JMP1.2
  BOTTOM w0.381: C1.1 3.33,15.04 J8.SH1 ; R1.1 3.27,11.74 J8.SH2
VBUS: length 32.5
  TOP w0.381: v1(12.83,19.52) 13.36,19.52 13.52,19.36 R4.1
  TOP w0.508: v1(26.62,21.96) 27,21.58 U2.3 ; v1(26.62,23.33) 26.77,23.48 U2.1 ; R2.1 v1(23.14,21.32)
  BOTTOM w0.508: v1(26.62,23.33) 26.71,23.42 C23.1 ; U8.2 9.09,18.26 9.31,18.48 10.11,18.48 10.57,18.93 10.57,19.54 10.83,19.81 R3.2 12.54,19.81 v1(12.83,19.52) 13.61,20.3 21.22,20.3 22.24,21.32 v1(23.14,21.32) 23.77,21.96 v1(26.62,21.96) C22.1
  BOTTOM w0.635: C22.1 C23.1
VBUS_IN: length 8.9
  TOP w0.254: C2.1 6.79,18.88 U4.6
  TOP w0.381: v1(5.54,18.2) 5.54,15 5.19,14.65 4.64,14.65 4.63,14.66 J8.1
  TOP w0.508: C2.1 6.05,18.91 5.54,18.4 v1(5.54,18.2)
  BOTTOM w0.508: U8.3 5.71,18.37 v1(5.54,18.2)
VIN: length 14.4
  TOP w0.381: 46.46,2.76 J2.20 44.98,2.76
  BOTTOM w0.381: R46.1 55.89,17.76 55.51,18.15 47.35,18.15 v1(45.31,16.11)
I2C_SCL: length 78.8
  TOP w0.152: J6.4 17.78,23.61 16.74,22.57 v1(16.74,21.09) 16.74,20.63 17.04,20.33 17.63,20.33 18.92,19.03 v1(18.92,18.63) ; v1(15.48,7.9) 15.39,7.99 U1.38 ; v1(49.78,3.13) 49.78,4.07 51.38,5.67 52.21,5.67 52.36,5.83 R39.1 53.89,6.54 R50.1 ; v1(39.37,12.09) 39.22,12.24 37.41,12.24 36.22,13.43 35.05,13.43 33.88,12.27 32.46,12.27 30.71,14.02 v1(30.38,14.02)
  BOTTOM w0.152: v1(49.78,3.13) 42.8,3.13 39.62,6.31 39.62,11.83 v1(39.37,12.09) ; v1(15.48,7.9) 15.67,7.71 16.31,7.71 16.76,8.16 16.76,10.98 17.17,11.39 28.08,11.39 30.38,13.69 v1(30.38,14.02) 30.38,15.61 29.76,16.23 26.12,16.23 23.77,18.58 18.97,18.58 v1(18.92,18.63) ; R21.1 v1(16.74,21.09)
I2C_SDA: length 77.7
  TOP w0.152: v1(29.46,15.77) 30.26,15.77 31.45,14.59 33.85,14.59 35.26,16 36.2,16 37.44,14.75 40.35,14.75 v1(40.69,15.1) ; v1(18.3,18.56) 18.3,19.2 17.53,19.97 16.92,19.97 16.13,20.76 v1(16.13,21.12) 16.13,22.51 15.24,23.4 J6.5 ; v1(47.22,4.66) 47.22,6.92 48.35,8.05 R51.1 49.12,7.33 49.3,7.15 49.76,7.15 49.91,7 49.91,6.67 50.04,6.54 R38.1 ; U1.39 15.79,8.65 16.08,8.37 v1(16.31,8.37)
  BOTTOM w0.152: v1(40.69,15.1) 40.92,14.87 40.92,7.43 43.69,4.66 v1(47.22,4.66) ; R20.1 16.08,21.09 16.1,21.12 v1(16.13,21.12) ; v1(18.3,18.56) 18.69,18.17 23.75,18.17 26.15,15.77 v1(29.46,15.77) 29.92,15.31 29.92,13.74 27.88,11.69 17.04,11.69 16.31,10.96 v1(16.31,8.37)
KP_DM: length 6.7
  TOP w0.127: J8.2 4.98,14.01 5.18,13.81 6.55,13.81 6.91,14.17 6.91,14.61 v1(6.65,14.87) 6.79,15.01 U4.1
  BOTTOM w0.127: v1(6.65,14.87) 7.14,14.39 7.59,14.39 7.9,14.08 R19.1
KP_DP: length 6.6
  TOP w0.127: J8.3 4.98,13.36 5.18,13.56 6.65,13.56 7.17,14.07 7.17,14.61 v1(7.43,14.87) 7.29,15.01 U4.2
  BOTTOM w0.127: v1(7.43,14.87) 8.22,14.87 8.35,15 R18.1
P0_0: length 6.5
  TOP w0.152: U5.5 v1(90.37,7.88)
  BOTTOM w0.152: C36.1 90.78,11.59 90.93,11.44 91.29,11.44 91.5,11.23 Y2.1 91.5,8.95 91.34,8.8 90.86,8.8 90.37,8.32 v1(90.37,7.88)
P0_1: length 5.8
  TOP w0.152: v1(89.46,7.83) 89.47,7.82 U5.6
  BOTTOM w0.152: v1(89.46,7.83) 89.46,8.54 89,9.01 Y2.2 89,11.23 89.18,11.41 89.36,11.41 89.58,11.64 C37.1
P0_4: length 54.8
  TOP w0.152: v1(91.34,21.35) 91.4,21.28 91.77,21.28 92.18,20.87 U5.41 92.18,19.11 90.75,17.69 v1(90.75,16.11) ; J1.7 78.74,23.73 79.16,23.31 89.24,23.31 v1(89.66,22.9) ; v1(67.34,15.54) 67.89,16.09 SW2.2 SW2.1 74.09,16.09 74.75,15.43 74.75,13.13 76.72,11.16 v1(76.72,9.94)
  BOTTOM w0.152: v1(67.34,15.54) R33.1 68.45,15.55 R30.2 ; v1(90.75,16.11) 90.63,15.99 87.2,15.99 81.14,9.93 76.73,9.93 v1(76.72,9.94) ; v1(89.66,22.9) 89.68,22.91 89.9,22.91 91.34,21.47 v1(91.34,21.35)
P0_5: length 59.6
  TOP w0.152: J1.6 81.28,23.89 81.43,23.73 87.88,23.73 v1(88.01,23.86) ; v1(92.13,14.44) 93.08,13.5 U5.2
  BOTTOM w0.152: R45.1 55.89,13.7 R44.1 59.74,15.3 60.78,16.34 64.15,16.34 68.21,20.41 74.14,20.41 76.83,23.1 80.75,23.1 81.28,23.63 J1.6 ; v1(92.13,14.44) 92.13,14.46 92.08,14.51 92.08,21.35 90.04,23.38 88.49,23.38 v1(88.01,23.86)
P5_0: length 46.8
  TOP w0.152: v1(76.48,8.6) 76.15,8.27 R52.2 75.47,5.61 73.32,3.45 56.17,3.45 55.88,3.16 J2.16 ; v1(88.72,14.51) 88.72,16.09 89.32,16.69 89.32,18.08 90.37,19.14 U5.39
  BOTTOM w0.152: v1(88.72,14.51) 88.32,14.92 87.74,14.92 81.55,8.72 76.61,8.72 v1(76.48,8.6)
P5_1: length 54.7
  TOP w0.152: U5.40 91.28,19.11 90.3,18.13 90.3,15.28 v1(90.6,14.97) ; R53.2 72.16,6.87 72.82,7.53 72.82,8.98 73.1,9.26 74.32,9.26 v1(74.57,9)
  BOTTOM w0.152: v1(90.6,14.97) 90.35,15.22 87.56,15.22 81.5,9.15 74.73,9.15 v1(74.57,9) 74.3,8.72 63.35,8.72 62.78,9.29 60.44,9.29 56.57,5.42 55.88,5.42 53.34,2.88 J2.17
P5_2: length 43.9
  TOP w0.152: U5.38 89.47,18.92 88.95,18.4 88.95,16.76 88.07,15.89 v1(88.07,14.46)
  BOTTOM w0.152: J2.15 58.42,5.93 61.44,8.95 62.61,8.95 63.42,8.14 76.67,8.14 76.94,8.42 81.69,8.42 87.73,14.46 v1(88.07,14.46)
P5_3: length 39.6
  TOP w0.152: U5.37 88.57,18.73 88.51,18.67 88.51,16.89 87.45,15.83 v1(87.45,12.3)
  BOTTOM w0.152: v1(87.45,12.3) 87.08,12.3 81.29,6.51 69.7,6.51 67.25,4.07 62,4.07 60.96,3.03 J2.14
P5_4: length 35.4
  TOP w0.152: v1(85.52,10.09) 85.67,10.25 85.67,14.54 84.06,16.15 U5.25
  BOTTOM w0.152: v1(85.52,10.09) 85.45,10.09 81.56,6.21 69.82,6.21 67.36,3.74 65.23,3.74 J2.13
P5_5: length 35.3
  TOP w0.152: v1(86.82,10.3) 86.82,15.76 88.19,17.13 88.19,18.46 87.67,18.98 U5.36
  BOTTOM w0.152: J2.12 66.04,2.97 66.51,3.44 67.49,3.44 67.84,3.79 69.01,3.79 71.12,5.9 81.69,5.9 85.34,9.56 86.08,9.56 v1(86.82,10.3)
P5_6: length 32.8
  TOP w0.152: U5.32 84.06,19.18 83.59,18.7 83.59,17.05 85.98,14.67 85.98,9.55 v1(85.46,9.03)
  BOTTOM w0.152: v1(85.46,9.03) 82.03,5.6 71.25,5.6 69.13,3.48 69.09,3.48 68.58,2.97 J2.11
P5LP0_1: length 16
  TOP w0.152: U1.49 19.79,8.54 20.88,7.45 20.88,6.53 20.12,5.76 15.91,5.76 13.39,3.24 11.38,3.24 J7.7
P5LP0_2: length 13.8
  TOP w0.152: J7.6 16.14,5.46 20.24,5.46 21.23,6.45 21.23,7.63 20.19,8.67 U1.50
P5LP1_2: length 30.7
  TOP w0.152: SW3.2 SW3.1 29.22,6.46 30.61,7.85 30.61,12.41 29.41,13.6 v1(29.41,14.04) ; U1.13 15.79,18.35 v1(15.71,18.43)
  BOTTOM w0.152: v1(29.41,14.04) 26.28,14.04 22.58,17.74 16.88,17.74 16.18,18.43 v1(15.71,18.43)
P5LP1_4: length 24.6
  TOP w0.152: U1.15 14.99,18.71 15.39,19.11 15.39,20.43 14.82,21 13.25,21 12.29,21.96 11.18,21.96 10.63,21.41 10.63,16.93 v1(11.2,16.36)
  BOTTOM w0.152: v1(11.2,16.36) 11.2,14.03 10.02,12.85 8.15,12.85 7.58,12.27 R17.1
P5LP3_0: length 22.2
  TOP w0.152: v1(10.46,12.46) 10.67,12.25 13.39,12.25 U1.29
  BOTTOM w0.152: J7.2 22.86,3.16 22.28,3.74 20.5,3.74 19.99,4.25 16.92,4.25 15.2,5.97 13.88,5.97 10.46,9.38 v1(10.46,12.46)
P5LP3_4: length 19.5
  TOP w0.152: v1(9.96,5.51) 9.96,6.87 11.53,8.44 11.53,9.54 12.64,10.65 U1.33
  BOTTOM w0.152: J7.3 20.32,3.26 19.69,3.9 16.46,3.9 15.09,5.27 10.2,5.27 v1(9.96,5.51)
P5LP3_5: length 15.9
  TOP w0.152: v1(10.69,4.53) 10.69,5.9 11.99,7.2 11.99,9.46 12.78,10.25 U1.34
  BOTTOM w0.152: v1(10.69,4.53) 14.96,4.53 16.05,3.44 17.37,3.44 17.78,3.03 J7.4
P5LP3_6: length 12
  TOP w0.152: J7.5 15.24,3.5 16.57,4.84 v1(17.48,4.84) ; v1(13.97,8.09) 14.33,8.09 14.59,8.35 U1.36
  BOTTOM w0.152: v1(13.97,8.09) 13.97,7.17 14.82,6.32 16.88,6.32 17.48,5.73 v1(17.48,4.84)
P5LP12_5: length 8.2
  TOP w0.152: v1(20.32,21.35) 19.91,21.35 19.18,20.61 19.18,19.3 19.39,19.09 U1.4
  BOTTOM w0.152: J6.3 v1(20.32,21.35)
P5LP_SIO_VREF: length 15.1
  TOP w0.152: U1.48 19.39,8.41 20.4,7.4 v1(20.4,6.84) ; v1(26.06,6.84) 26.43,6.84 27.41,7.83 R14.2 R13.2
  BOTTOM w0.152: v1(26.06,6.84) v1(20.4,6.84)
P5LP_VCCD: length 16
  TOP w0.203: U1.26 12.76,13.45 v1(12.19,12.88) ; v1(22.48,12.34) 22.38,12.25 U1.57
  TOP w0.381: C14.1 23.35,11.96 22.96,12.34 v1(22.48,12.34)
  BOTTOM w0.381: v1(22.48,12.34) 22.39,12.25 12.81,12.25 v1(12.19,12.88) 12.41,13.09 C15.1
P5LP_VDD: length 103.6
  TOP w0.203: v1(12.45,8.87) 13.99,8.87 14.19,9.08 U1.35 ; U1.44 17.79,8.45 v1(17.7,8.37) ; U1.67 22.84,16.25 C6.1 ; v1(11.76,14.13) 11.87,14.25 U1.24 ; C8.1 23.85,9.02 v1(22.85,10.03) 22.63,10.25 U1.52 ; U1.59 22.28,13.05 v1(22.53,13.29) ; v1(13.87,18.27) 14.04,18.27 14.19,18.12 U1.17
  TOP w0.254: C8.1 23.85,7.95 24.11,7.69 25.86,7.69 26.11,7.95 26.11,12.05 25.86,12.3 23.99,12.3 23.47,12.82 C7.1 ; C6.1 23.03,17.27 v1(21.46,17.27)
  TOP w0.381: v1(17.7,8.37) 17.7,8.24 C17.1 ; v1(19.3,23.45) 19.53,23.68 24.89,23.68 25.4,24.19 J6.1 ; C7.1 23.01,13.78 v1(22.53,13.29)
  BOTTOM w0.381: v1(17.7,8.37) 17.7,8.75 C19.1 21.16,9.33 21.49,9.66 C18.1 22.58,10.3 v1(22.85,10.03) ; C16.1 13.46,17.87 v1(13.87,18.27) ; C16.1 C10.1 13.46,14.39 C5.1 11.99,14.36 v1(11.76,14.13) 11.76,13.8 11.1,13.14 11.1,9.64 11.86,8.87 v1(12.45,8.87) 12.47,8.85 C20.1 C3.1 ; C16.1 12.07,16.95 11.68,17.33 R3.1 10.78,18.01 10.11,17.33 6.65,17.33 6.64,17.33 4.88,17.33 4.29,17.92 4.29,22.39 5.56,23.66 19.1,23.66 v1(19.3,23.45) ; C21.1 16.31,17.71 16.75,17.27 v1(21.46,17.27) 21.49,17.25 C9.1 21.49,13.3 C4.1 v1(22.53,13.29)
  BOTTOM w0.508: C21.1 14.94,17.71 14.38,18.27 v1(13.87,18.27) 12.75,18.27 12.49,18.01 R3.1
P6_2: length 17.5
  TOP w0.152: J1.12 68.73,22.18 76.07,22.18 77.52,20.74 78.46,20.74 79.67,19.53 79.67,19.14 79.95,18.85 U5.28
P6_3: length 30.8
  TOP w0.152: U5.30 82.26,20.79 82.11,20.94 v1(80.82,20.94) 80.07,20.94 78.24,22.77 70.69,22.77 J1.11 ; R36.1 72.71,10.41 v1(73.33,11.03)
  BOTTOM w0.152: v1(73.33,11.03) 73.58,11.03 80.82,18.28 v1(80.82,20.94)
P6_4: length 37.6
  TOP w0.152: J2.18 50.8,4.51 51.51,5.22 55.3,5.22 55.79,5.71 R50.2 55.87,6.51 v1(56.92,6.51) ; v1(78.73,14.92) 79.05,15.25 U5.24
  BOTTOM w0.152: v1(56.92,6.51) 57.12,6.51 60.63,10.02 73.25,10.02 73.83,10.59 74.82,10.59 78.73,14.5 v1(78.73,14.92)
P6_5: length 46.9
  TOP w0.152: v1(79.43,20.43) 79.43,20.23 79.9,19.76 U5.29 ; v1(48.11,6.23) 49.11,6.23 R51.2 49.12,3.97 48.26,3.11 J2.19
  BOTTOM w0.152: v1(79.43,20.43) 75.97,20.43 75.03,19.49 75.03,15.57 71.13,11.67 57.91,11.67 52.48,6.23 v1(48.11,6.23)
P6_6: length 3.5
  TOP w0.152: v1(79.21,19.17) 79.2,19.16 79.2,18.44 79.68,17.95 U5.27
  BOTTOM w0.152: R49.2 v1(79.21,19.17)
P6_7: length 3.8
  TOP w0.152: U5.26 79.63,17.05 79.08,16.5 78.42,16.5 78.31,16.61 v1(78.26,16.61)
  BOTTOM w0.152: v1(78.26,16.61) 78.26,16.62 78.31,16.67 R48.2
P6_VDD: length 106.5
  TOP w0.508: J1.20 45.72,23.07 45.19,22.54 43.92,22.54 41.91,20.53 v1(41.91,19.9) ; R29.2 65.58,12.53 65.09,12.04 65.09,9.87 63.63,8.41 v1(62.15,8.41) 61.83,8.09 54.3,8.09 53.09,9.31 52.22,9.31 49.98,11.55 R28.1 ; U5.4 91.28,5.3 v1(91.82,4.76)
  TOP w0.635: J3.1 46.43,9.79 48.19,11.55 R28.1
  BOTTOM w0.508: v1(62.15,8.41) 62.91,7.66 76.89,7.66 77.14,7.91 81.99,7.91 87.86,13.78 91.74,13.78 92.28,13.24 93.01,13.24 ; 93.42,13.24 93.01,13.24 ; 93.42,13.24 93.42,13.65 ; 93.42,13.24 93.42,12.84 ; 93.01,13.24 93.42,12.84 ; 93.01,13.24 93.42,13.65 ; 93.42,12.84 93.42,8.99 91.96,7.53 C29.1 91.96,4.9 v1(91.82,4.76) ; 93.42,13.65 93.42,14.41 92.56,15.28 92.56,20.32 93.24,21 93.24,23.07 93.98,23.81 J1.1 ; J3.1 44.7,9.79 43.43,11.06 43.43,18.37 v1(41.91,19.9)
P7_1: length 30.2
  TOP w0.152: U5.23 80.78,14.32 v1(77.9,14.32) 77.75,14.48 77.75,19.92 75.82,21.85 71.37,21.85 v1(71.12,21.6) ; v1(74.83,11.64) 72.63,13.84 R37.2
  BOTTOM w0.152: J1.10 v1(71.12,21.6) ; C30.2 78.77,15.61 77.9,14.74 v1(77.9,14.32) 77.51,14.32 v1(74.83,11.64)
P7_2: length 18.3
  TOP w0.152: U5.22 79.05,13.44 78.85,13.64 v1(78.85,13.65) 77.93,13.65 77.39,14.18 77.39,19.7 75.69,21.4 v1(73.71,21.4)
  BOTTOM w0.152: C31.2 78.91,13.6 v1(78.85,13.65) ; v1(73.71,21.4) 73.7,21.41 73.7,24.84 J1.9
P7_7: length 12
  TOP w0.152: U5.31 83.16,21.18 82.94,21.4 v1(81.91,21.4) 81.9,21.42 80.3,21.42 78.18,23.53 76.58,23.53 76.19,23.92 J1.8
  BOTTOM w0.152: v1(81.91,21.4) C32.2
P9_0: length 43.4
  TOP w0.152: U5.17 78.88,8.94 77.79,10.03 77.79,11.15 77.8,11.16 77.8,11.39 75.79,13.4 75.79,14.12 75.81,14.13 75.81,17.93 74.04,19.7 61.06,19.7 58.78,21.98 49.86,21.98 48.26,23.58 J1.19
P9_1: length 40.3
  TOP w0.152: J1.18 50.8,23.53 51.87,22.46 59.41,22.46 61.87,20 74.17,20 76.12,18.04 76.12,14.01 76.11,13.99 76.11,13.51 78.1,11.52 78.1,10.52 78.79,9.84 U5.18
P9_2: length 36.9
  TOP w0.152: U5.21 78.6,12.54 77.09,14.06 77.09,18.43 74.6,20.91 64.69,20.91 64.47,21.14 v1(64.47,21.47)
  BOTTOM w0.152: J1.17 53.34,22.79 55.14,20.99 63.98,20.99 v1(64.47,21.47)
P9_3: length 46.9
  TOP w0.152: U5.9 86.77,5.36 86.11,4.71 80.97,4.71 79.53,6.14 79.53,6.14 77.18,8.49 77.18,11.14 75.07,13.24 75.07,17.8 73.81,19.06 59.39,19.06 v1(56.93,21.51)
  BOTTOM w0.152: v1(56.93,21.51) 56.25,21.51 55.88,21.88 J1.16
P9_4: length 39.2
  TOP w0.152: v1(58.42,21.47) 60.5,19.39 73.91,19.39 75.39,17.92 75.39,13.37 77.48,11.28 77.48,8.63 80.56,5.55 81.99,5.55 82.26,5.82 U5.14
  BOTTOM w0.152: v1(58.42,21.47) J1.15
P9_5: length 30.1
  TOP w0.152: J1.14 60.96,22.55 63.2,20.3 74.32,20.3 76.43,18.2 76.43,13.62 78.41,11.64 78.41,11.02 78.69,10.74 U5.19
P9_6: length 27.4
  TOP w0.152: J1.13 63.5,21.5 64.4,20.61 74.45,20.61 76.78,18.27 76.78,13.71 78.85,11.64 U5.20
P10_0: length 15.3
  TOP w0.152: v1(82.42,5.29) 82.8,5.29 83.16,5.65 U5.13
  BOTTOM w0.152: J2.10 71.12,3.01 73.4,5.29 v1(82.42,5.29)
P10_1: length 13.7
  TOP w0.152: v1(83.6,5.52) 83.81,5.52 84.06,5.78 U5.12
  BOTTOM w0.152: v1(83.6,5.52) 83.55,5.52 82.87,4.84 75.28,4.84 73.66,3.22 J2.9
P10_2: length 27.2
  TOP w0.152: U5.33 84.96,19.34 84.76,19.14 84.45,19.14 83.97,18.65 83.97,17.36 86.28,15.05 v1(86.28,9.07)
  BOTTOM w0.152: J2.8 76.2,3.36 77.37,4.53 83.31,4.53 84.33,5.55 84.33,6.33 86.28,8.29 v1(86.28,9.07)
P10_3: length 13.4
  TOP w0.152: U5.7 88.57,5.23 87.59,4.25 80.98,4.25 80.24,3.52 80.24,2.37 79.88,2.02 J2.7
P10_4: length 9.9
  TOP w0.152: v1(87.73,5.59) 87.67,5.66 U5.8
  BOTTOM w0.152: J2.6 82.32,2.02 82.7,2.4 82.7,3.49 84.84,5.62 87.7,5.62 v1(87.73,5.59)
P10_5: length 5.4
  TOP w0.152: U5.11 84.94,6.8 84.94,5.29 v1(85.06,5.17)
  BOTTOM w0.152: v1(85.06,5.17) 85.06,5.12 83.82,3.87 J2.5
P10_6: length 5
  TOP w0.152: v1(85.9,5.17) 85.87,5.2 U5.10
  BOTTOM w0.152: v1(85.9,5.17) 85.9,5.14 86.36,4.68 J2.4
P12_6: length 11.1
  TOP w0.152: U5.34 85.87,18.98 85.41,18.53 84.82,18.53 v1(84.67,18.37)
  BOTTOM w0.152: 84.67,18.91 v1(84.67,18.37) ; 84.67,18.91 84.82,19.06 ; 84.67,18.91 84.67,19.02 84.62,19.06 ; Y1.3 84.82,19.06 ; 84.82,19.06 84.62,19.06 ; J1.5 83.82,23.33 83.69,23.2 C34.2 84.48,19.21 84.62,19.06
P12_7: length 14.2
  TOP w0.152: v1(87.73,18.06) 87.73,18.31 87.42,18.63 86.99,18.63 86.77,18.85 U5.35
  BOTTOM w0.152: Y1.1 v1(87.73,18.06) 88.07,18.06 88.16,17.97 C35.2 89.51,17.97 90.04,18.5 90.04,20.38 87.05,23.38 86.56,23.38 86.36,23.58 J1.4
PMIC_EN: length 12
  TOP w0.152: U6.3 v1(46.36,13.35)
  BOTTOM w0.152: R46.2 R44.2 54.09,14.53 52.91,13.35 v1(46.36,13.35)
RESET: length 58.6
  TOP w0.152: v1(58.67,8.78) 54.53,8.78 54.2,9.1 54.2,10.09 54.03,10.27 R47.1 ; v1(29.41,14.93) 30.47,14.93 31.95,13.45 J4.3 ; U1.3 19.79,18.15 20.02,18.37 23.19,18.37 23.48,18.08 v1(23.48,17.68)
  BOTTOM w0.152: J4.3 J5.3 39.37,13.45 39.93,12.89 39.93,6.44 42.77,3.59 53.34,3.59 58.52,8.78 v1(58.67,8.78) ; v1(29.41,14.93) 26.23,14.93 v1(23.48,17.68)
SWDCLK: length 82.1
  TOP w0.152: U1.47 18.99,8.22 19.46,7.76 v1(19.46,6.86)
  BOTTOM w0.152: v1(19.46,6.86) 19.46,7.3 19.77,7.62 25.5,7.62 31.27,13.38 31.27,15.19 32.07,15.99 J4.4 J5.4 39.42,15.99 39.7,15.71 39.7,14.64 40.23,14.11 40.23,6.56 42.9,3.9 53.14,3.9 59.66,10.42 71.86,10.42 76.5,15.07 76.5,16.93 76.51,16.93 R48.1
SWDIO: length 86.5
  TOP w0.152: U1.46 18.59,8.44 v1(18.52,8.37)
  BOTTOM w0.152: R49.1 75.88,19.17 75.64,18.93 75.64,14.64 71.91,10.91 59.72,10.91 53.01,4.2 43.03,4.2 40.54,6.69 40.54,14.28 40.03,14.79 40.03,17.92 39.42,18.53 J5.5 J4.5 31.93,18.53 30.86,17.46 30.86,13.69 28.04,10.87 24.79,10.87 22.2,8.28 18.61,8.28 v1(18.52,8.37)
UART_CTS: length 2.6
  TOP w0.152: R12.2 22.06,13.85 U1.61
UART_RX: length 96.1
  TOP w0.152: v1(39.9,19.64) 39.4,20.15 38.17,20.15 36.96,18.93 34.82,18.93 34.29,19.47 v1(34.29,20.2) 33.67,20.83 26.38,20.83 26.34,20.86 26.31,20.86 25.96,21.22 25.96,23.38 26.75,24.17 26.75,25.51 26.14,26.12 13.94,26.12 J6.6 11.46,26.12 9.37,26.12 9.07,25.82 9.07,24.04 9.74,23.37 9.74,16.62 10.92,15.45 U1.21 ; v1(52.53,4.76) 55.58,4.76 56.01,5.19 56.95,5.19 57.78,6.03 69.34,6.03 69.46,6.15 R53.1
  BOTTOM w0.152: v1(39.9,19.64) 41.66,17.89 41.66,8.21 44.3,5.57 51.74,5.57 52.53,4.79 v1(52.53,4.76)
UART_TX: length 96.4
  TOP w0.152: R52.1 73.67,6.12 71.83,4.28 52.32,4.28 v1(51.87,4.73) 51.85,4.75 ; U1.20 10.96,15.85 10.05,16.76 10.05,23.07 10.05,23.07 10.05,23.12 10.16,23.2 10.16,23.2 J6.7
  BOTTOM w0.152: J6.7 11.23,25.94 32.96,25.94 34.75,24.16 v1(34.75,20.79) 34.75,19.64 35.24,19.15 36.89,19.15 37.44,19.7 v1(38.91,19.7) 41.3,17.3 41.3,7.91 43.94,5.27 51.33,5.27 v1(51.87,4.73)
USB_V_SENSE: length 11.1
  TOP w0.152: R4.2 13.33,20.44 13.23,20.34 R5.2 12.61,21.21 12.17,21.65 11.33,21.65 10.93,21.26 10.93,17.49 12.17,16.25 U1.19
VBACKUP: length 63.3
  TOP w0.381: R29.1 69.68,13.46 v1(69.65,13.5) 69.65,14.23 70.33,14.92 73.28,14.92 73.63,14.56 73.63,13.65 75.35,11.94 75.35,11.93 75.4,11.88 75.4,10.27 v1(75.26,10.13) ; v1(89.8,16.62) 89.8,14.88 92.61,12.08 92.61,8.47 92.18,8.04 U5.3 92.18,5.85 93.98,4.05 J2.1
  BOTTOM w0.381: R33.2 71.91,15.54 R32.1 71.92,13.94 71.48,13.5 v1(69.65,13.5) 69.29,13.14 60.41,13.14 59.88,13.68 R45.2 ; v1(89.8,16.62) 87.11,16.62 81.04,10.55 75.68,10.55 v1(75.26,10.13)
VOUT: length 23.6
  TOP w0.254: v1(28.65,19.64) 28.46,19.84 U3.1 ; U3.3 24.98,20.34 v1(24.77,20.56)
  TOP w0.508: v1(32.63,25) 32.63,23.7 U2.5 31.65,23.48 31.14,23.99 v1(31.14,25.03)
  BOTTOM w0.508: v1(28.65,19.64) 28.65,19.19 28.29,18.83 25.48,18.83 24.77,19.54 v1(24.77,20.56) ; v1(28.65,19.64) 28.65,23.45 29.21,24.01 C24.1 31.17,24.01 R6.2 ; v1(28.65,19.64) 29.5,19.64 R40.2 ; v1(31.14,25.03) 31.14,24.14 R6.2 ; v1(32.63,25) R8.2 31.46,23.82 R6.2
VREF: length 12.7
  TOP w0.381: v1(86.74,7.86) 86.57,8.03 U5.16
  BOTTOM w0.381: v1(86.74,7.86) 88.39,6.21 88.39,3.77 88.9,3.26 J2.3
VTARG: length 119.9
  TOP w0.305: 24.02,19.84 23.75,19.57 ; 24.02,19.84 23.79,19.84 23.75,19.8 ; 24.02,19.84 24.04,19.84 ; 24.04,19.84 23.75,20.13 ; 24.04,19.84 U3.4
  TOP w0.381: v1(18.62,22.08) 23.37,22.08 23.75,21.7 23.75,19.09 28.49,14.34 R13.1 ; v1(8.66,22.08) 8.64,22.06 8.64,16.81 8.85,16.6 8.85,14.51 7.77,13.43 7.77,11.29 8.15,10.91 R15.1
  TOP w0.508: J4.1 33.69,7.95 37.93,7.95 J5.1 ; R28.2 49.13,9.75 50.38,9.75 50.74,9.4 R38.2 R39.2 53.04,8.34 53.97,7.4 63.55,7.4 63.89,7.74 63.91,7.74 64.86,8.7 LED3.A LED4.A ; v1(29.34,8.13) 29.31,8.15 29.31,12.15 28.93,12.53 R13.1
  TOP w0.635: J3.2 46.43,7.25 48.75,9.74 R28.2 ; R27.1 49.89,18.8 49.89,20.13 48.95,21.07 43.59,21.07 42.82,20.3 v1(42.82,8.37) J5.1
  BOTTOM w0.381: 14.27,21.87 R20.2 ; 14.27,21.87 14.27,21.91 14.1,22.08 ; 14.27,21.87 14.48,22.08 ; 14.1,22.08 14.48,22.08 ; 14.1,22.08 v1(8.66,22.08) ; 14.48,22.08 v1(18.62,22.08) 18.6,22.06 R21.2
  BOTTOM w0.508: v1(29.34,8.13) 33.03,8.13 J4.1 33.69,7.95 37.93,7.95 J5.1
  BOTTOM w0.635: v1(42.82,8.37) 44.55,8.37 J3.2
VTARG_MEAS: length 5.8
  TOP w0.203: v1(12.06,10.91) 12.2,11.05 U1.32
  TOP w0.381: R15.2 v1(12.06,10.91)
  BOTTOM w0.381: R16.2 12.65,11.49 v1(12.06,10.91)
XRES: length 53.1
  TOP w0.152: v1(91.21,15.26) 91.21,17.33 93.08,19.2 U5.42 93.08,20.8 v1(92.61,21.27) ; v1(63.8,9.49) SW1.1 SW1.2 56.05,9.49 55.96,9.59 55.96,10.07 55.75,10.27 R47.2
  BOTTOM w0.152: v1(63.8,9.49) 64.26,9.03 73.63,9.03 74.09,9.48 81.29,9.48 87.33,15.53 90.95,15.53 v1(91.21,15.26) ; v1(92.61,21.27) 92.61,22.32 91.2,23.73 89.1,23.73 88.9,23.94 J1.3
N17125101: length 4.1
  TOP w0.152: C12.1 10.08,12.18 10.81,11.45 U1.31
N17125106: length 3
  TOP w0.152: U1.53 23.02,10.65 23.67,9.99 C11.1
N17125108: length 4.4
  TOP w0.152: U1.42 16.99,7.88 16.33,7.22 C13.1
N17125157: length 4.1
  TOP w0.152: v1(10.11,15.35) 10.41,15.05 U1.22
  BOTTOM w0.152: v1(10.11,15.35) 9.98,15.48 R18.2
N17125159: length 4.2
  TOP w0.152: U1.23 10.42,14.65 v1(10.11,14.34)
  BOTTOM w0.152: v1(10.11,14.34) 9.86,14.08 R19.2
N19176724: length 2.4
  TOP w0.152: LED3.K 70.87,8.7 70.95,8.61 R36.2
N19176763: length 3.5
  TOP w0.152: R37.1 71.24,12.04 70.89,11.69 70.89,10.88 70.41,10.4 LED4.K
N19177069: length 8.6
  TOP w0.152: SW2.4 SW2.3 73.58,18.24 v1(74.49,17.33)
  BOTTOM w0.152: R32.2 R31.1 74.48,17.33 v1(74.49,17.33)
N19178187: length 4.2
  TOP w0.381: U6.4 49,13.35 49.22,13.57 R23.1
N19186096: length 2.6
  TOP w0.152: v1(5.69,7.6) 5.69,7.2 5.97,6.92 LED2.A
  BOTTOM w0.152: v1(5.69,7.6) 5.69,8.16 5.92,8.39 R17.2
N19227002: length 7.2
  TOP w0.152: U2.4 33.14,21.58 33.51,21.95 R7.1 v1(33.99,21.22)
  BOTTOM w0.152: R6.1 31.88,22.26 32.03,22.11 32.03,20.79 32.26,20.56 R41.1 33.76,20.56 33.99,20.79 v1(33.99,21.22)
N19228339: length 2.2
  BOTTOM w0.152: R8.1 33.71,22.51 33.56,22.36 R9.2
N19237692: length 1.4
  TOP w0.152: LED1.A 21.2,20.08 R2.2
N19253849: length 4.1
  TOP w0.152: v1(15.85,19.39) 16.66,19.39 17.3,18.76 17.3,18.3 16.99,17.99 U1.10
  BOTTOM w0.152: v1(14.88,19.39) v1(15.85,19.39)
N19308882: length 1.5
  BOTTOM w0.152: R40.1 29.67,20.56 R41.2
N19328633: length 4.6
  TOP w0.152: v1(16.81,18.45) 16.81,18.45 16.59,18.23 U1.11
  BOTTOM w0.152: v1(19.96,19.39) 18.49,19.39 17.55,18.45 v1(16.81,18.45)
N19328636: length 2.8
  TOP w0.152: U1.12 16.19,18.82 v1(16.28,18.91)
  BOTTOM w0.152: v1(17.42,19.39) 16.76,19.39 v1(16.28,18.91)

## Copper pours and planes (outline as drawn; the poured copper is in the pictures)
GND on TOP: 1.27,0.56 0.77,0.77 0.56,1.27 0.56,25.45 0.77,25.95 1.27,26.16 34.92,26.16 34.92,21.49 34.19,21.49 34.19,20.81 34.92,20.81 34.92,12.57 33.77,12.57 33.77,11.99 34.92,11.99 34.92,0.62 36.83,0.62 36.83,12.01 37.41,12.01 37.41,12.44 36.83,12.44 36.83,26.16 94.28,26.16 94.28,0.56 ; 25 cut-outs
GND on BOTTOM: 1.27,0.56 0.77,0.77 0.56,1.27 0.56,25.45 0.77,25.95 1.27,26.16 34.92,26.16 34.92,0.62 36.83,0.62 36.83,26.16 94.28,26.16 94.28,0.56 ; 3 cut-outs
VCC_3V3 on TOP: 46.91,14.44 53.04,14.44 53.16,14.56 53.16,16.39 54.23,17.46 55.75,17.46 55.96,17.66 55.96,19.42 55.78,19.59 53.24,19.59 52.98,19.34 52.98,17.54 52.86,17.41 51.08,17.41 50.62,17.87 47.47,17.87 47.29,17.69 47.29,16.24 46.86,15.81 46.86,14.49
VIN on TOP: 46.86,1.89 46.86,7.01 45.21,7.01 45.08,7.13 45.08,12.47 45.21,12.6 45.59,12.6 45.72,12.72 45.72,18.95 45.47,19.2 43.48,19.2 43.48,1.89
VTARG on TOP: 49.05,18.15 50.75,18.15 51.21,17.69 52.7,17.69 52.7,19.49 52.65,19.54 49.25,19.54 49,19.29 49,18.2

## Text on the board
BOTTOM: BOTTOM SIDE
Ref Des/Assembly Bottom: ASSEMBLY BOTTOM
Board Geometry/Soldermask Bottom: SOLDERMASK BOTTOM
Ref Des/Silkscreen Bottom: SW1 | SW2 | 0.4 | RESET | 6.3 | 7.1 | R36 | R37 | LED4(G) | LED3(R) | VTARG | TP1 | P6.VDD | 6 | 0.1 | 12. | 7 | 0.2 | 1 | 3.6 | 0 | 3.5 | 5 | 3.4 | 3.0 | GND | VDD | P5LP | VIN | SDA | 9.0 | 6.5 | SCL | 9.1 | 6.4 | TX | 9.2 | 5.1 | RX | 9.3 | 5.0 | 9.4 | 5.2 | 9.5 | 5.3 | 9.6 | 5.4 | 6.2 | 5.5 | LED3 | 5.6 | LED4 | 10.0 | 7.2 | 10.1 | 7.7 | 10.2 | 10.3 | 0.5 | 10.4 | 12.6 | 10.5 | 12.7 | 10.6 | VREF | VBACKUP | J6 | J7 | J4 | J5 | 21 | J2 | J1 | J3 | 12.1 | 12.0 | 12.6(TX) | 12.7(RX) | KITPROG2 | UART | I2C SDA | I2C SCL | (TX)5.1 | (RX)5.0 | PSoC 6 BLE | CINTB | CMOD | CINTA | SILKSCREEN BOTTOM
TOP: TOP SIDE
Ref Des/Assembly Top: ASSEMBLY TOP
Board Geometry/Soldermask Top: SOLDERMASK TOP
Ref Des/Silkscreen Top: P6.VDD | VIN | 15 | 29 | . | RESET | SW1 | VBACKUP | 43 | GND | 6.5 | 9.0 | SDA | 6.4 | 9.1 | SCL | 5.1 | 9.2 | TX | 5.0 | 9.3 | RX | 5.2 | 9.4 | 5.3 | 9.5 | 5.4 | 9.6 | 5.5 | 6.2 | 6.3 | 5.6 | LED3 | 7.1 | 0 | 10. | LED4 | 1 | 7.2 | 7.7 | 2 | CMOD | 0.4 | 3 | SW2 | 4 | 0.5 | 12 | 6 | 5 | 7 | VREF | KITPROG2 | USB | STATUS | CY8C5868LTI-LP039 | POWER | MODE | USER(0.4) | (G) | (R) | CYBLE-416045-02 | SILKSCREEN TOP
PAGE_OUTLINE: SOLDERPASTE TOP
DIMENSION: SOLDERPASTE BOTTOM
User.6: GOLDMASK TOP
User.7: GOLDMASK BOTTOM
User.18: 7B. FINAL FINISH ON EDGE CONNECTOR CONTACTS SHALL BE ELECTROLYTIC HARD GOLD PLATING, | 1X. EDGE PLATING REQUIRED. COPPER IS EXTENDED PAST THE APPLICABLE EDGES OF THE | .76 MICROMETERS [30 MICROINCHES] MINIMUM, OVER ELECTROLYTIC NICKEL PLATING, | 1.27 MICROMETERS [50 MICROINCHES] MINIMUM. | PCB IN THE PROVIDED DATA TO AID THE EDGE PLATING PROCESS. | FINAL FINISH NOTE: EDGE CONNECTOR CONTACTS | EDGE PLATING NOTE: (Add to end of notes when applicable; number accordingly)
User.22: PROTOTYPING KIT
User.23: 2
User.45: FIGURE | SIZE | 0.0079 | 0.0394 | 0.0400 | 0.0402 | 0.0335x0.0216 | 0.0453x0.0197 | 0.0600x0.0300 | 0.2400x0.0300 | DRILL CHART: TOP to BOTTOM | ALL UNITS ARE IN INCHES | TOLERANCE | +0.0020/-0.0079 | +0.0030/-0.0030 | +0.0020/-0.0020 | PLATED | NON-PLATED | QTY | 351 | 44 | 10 | 16 | 2 | 4
